# Altium PCB CATZILLA.PcbDoc (part 1 of 3)
Units mm, origin at the board's own origin, x right, y up, seen from the top; angles counter-clockwise.
Board outline 100 x 100 mm, 2 copper layers (Top Layer, Bottom Layer), stack 1.57 mm thick; 150 components, 108 nets, 585 pads, 1555 vias.
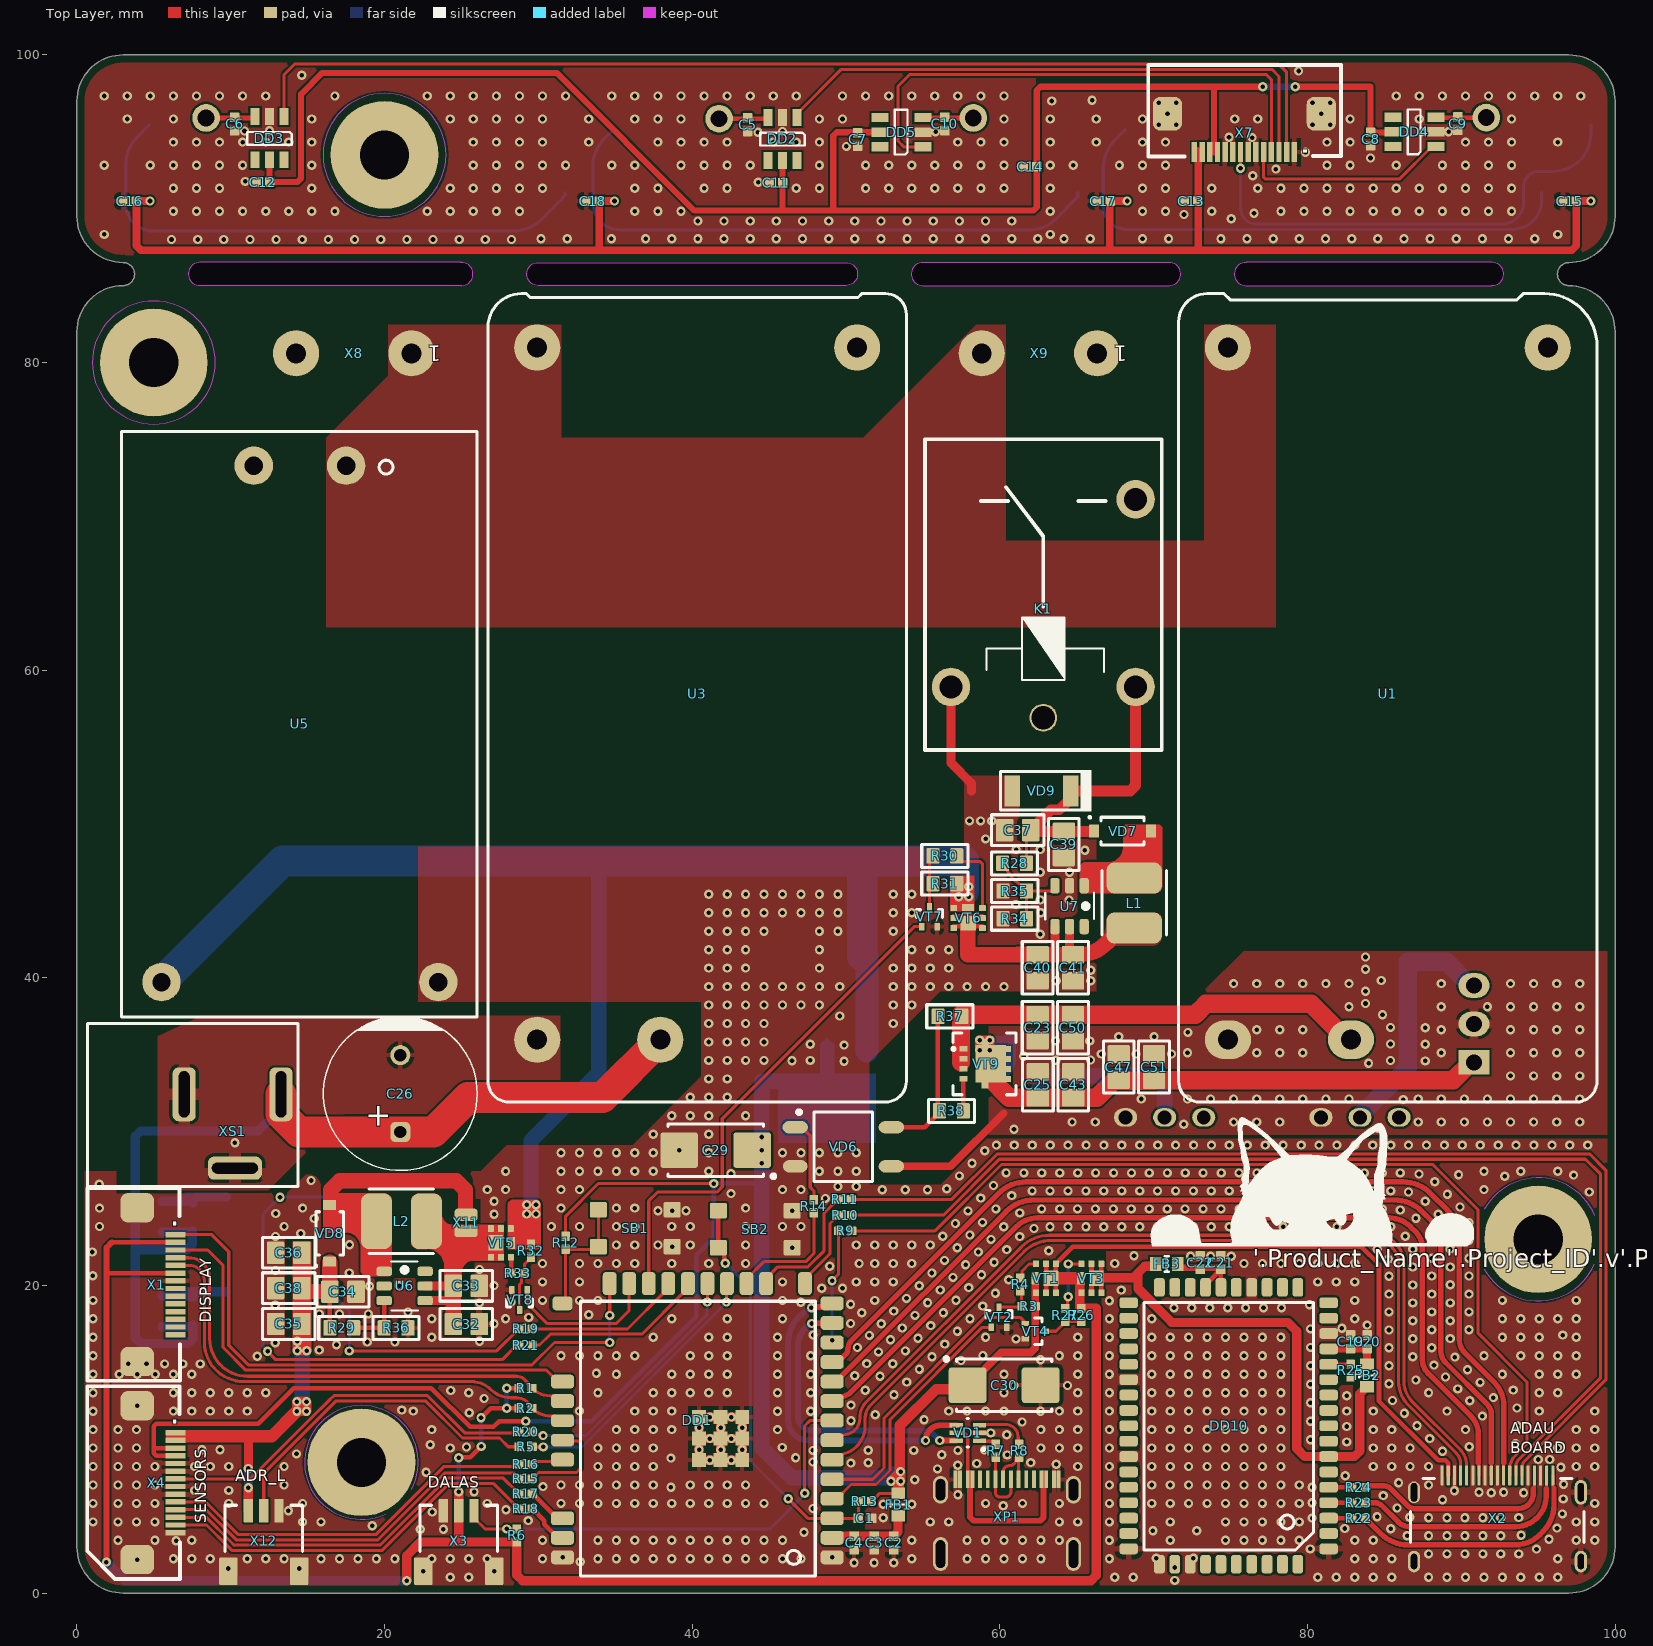
[diagram p0: Top Layer view]
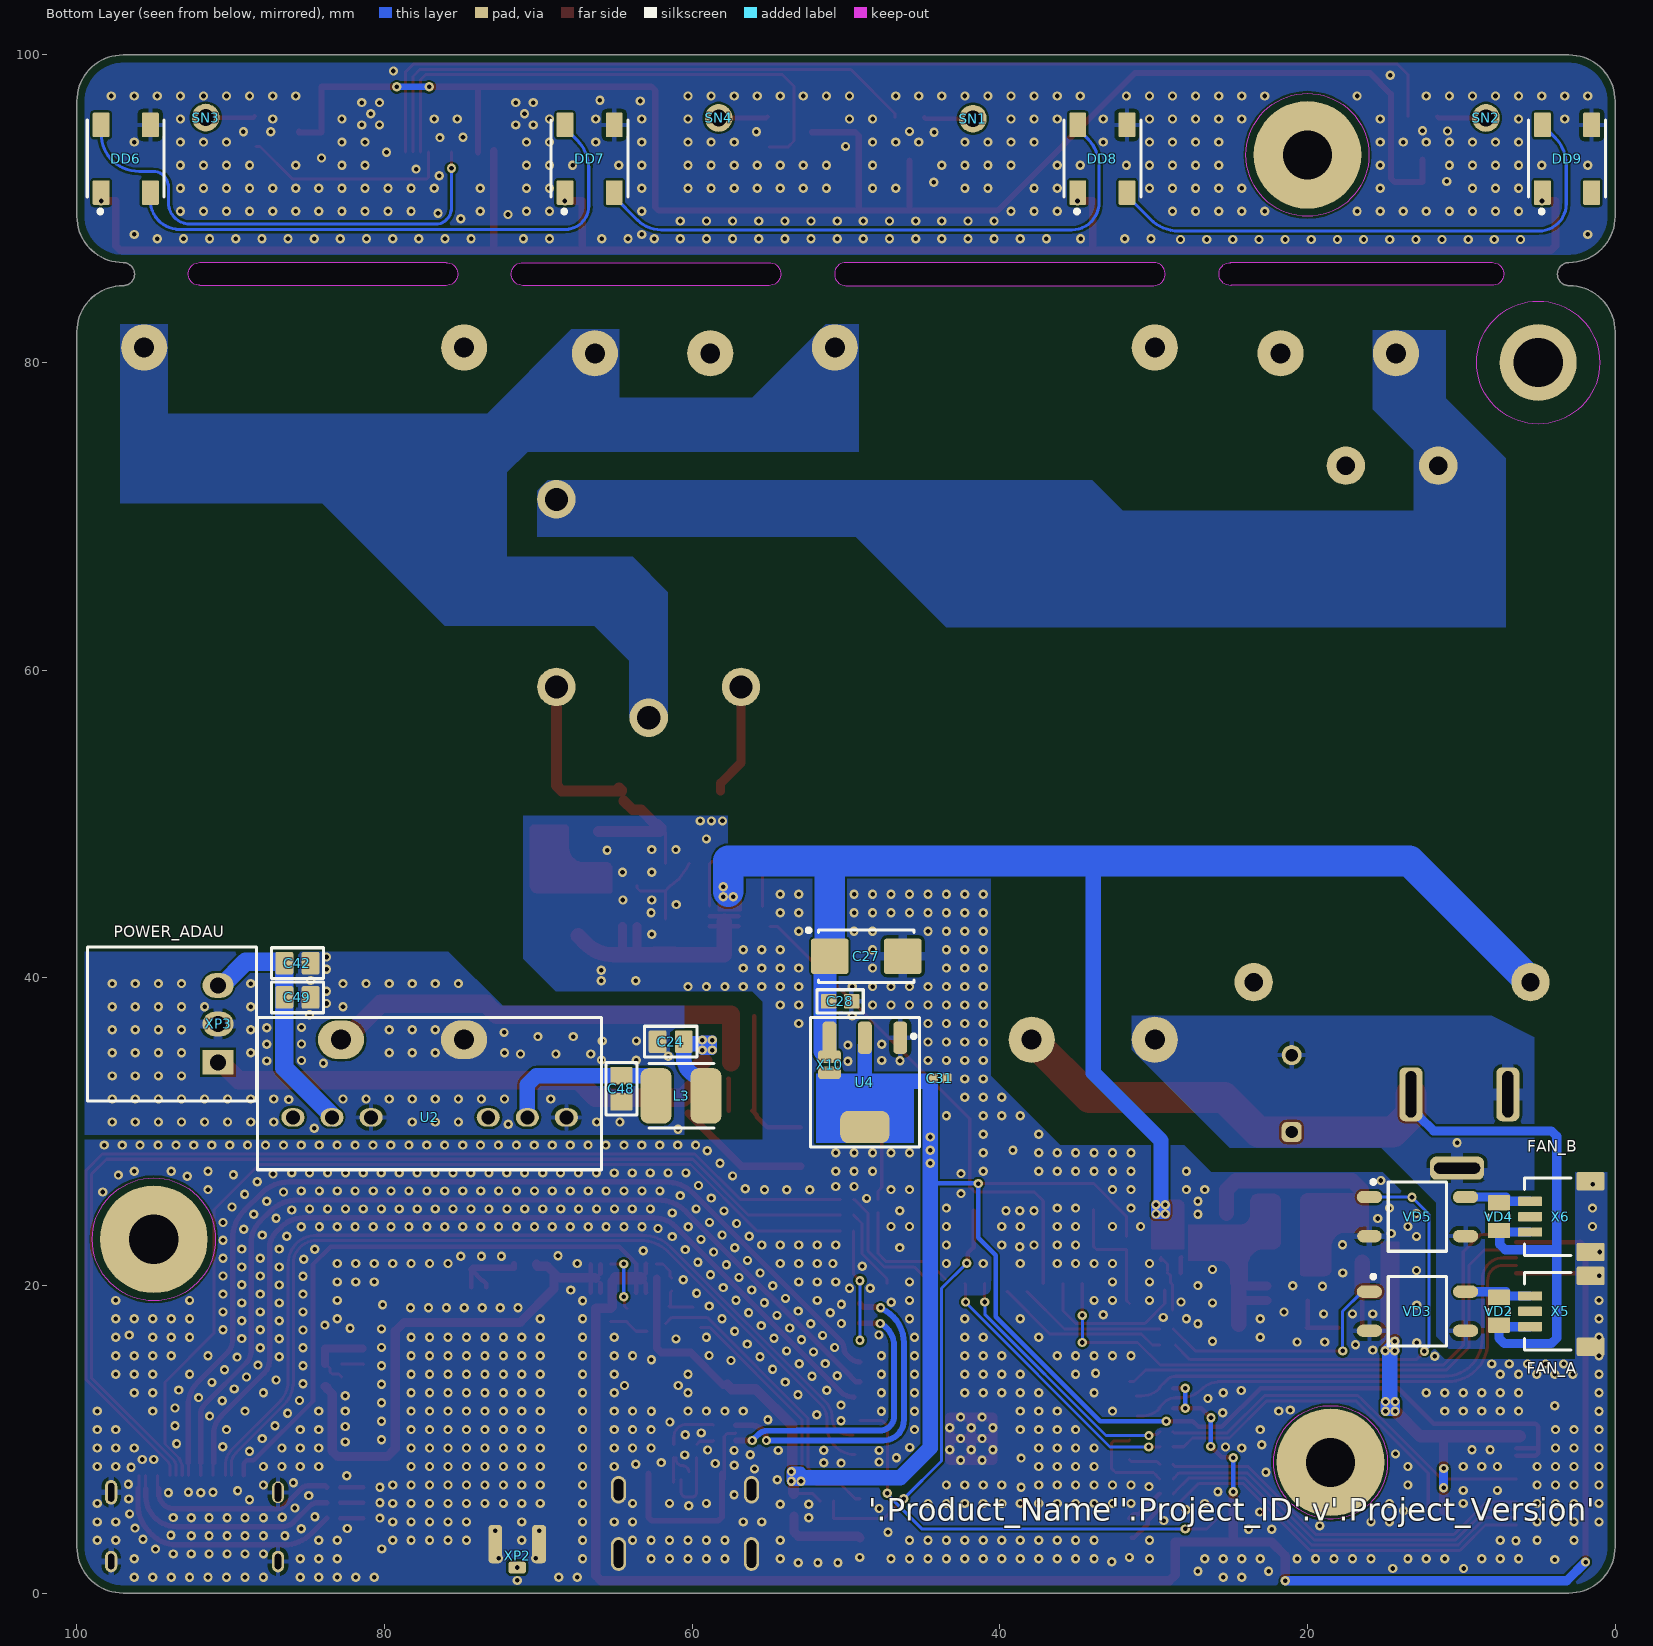
[diagram p1: Bottom Layer view, seen from below]

## Layer stack, top to bottom
Top Solder: solder mask 0.02, Solder Resist, Dk 3.8
Top Layer: signal copper 0.035
Dielectric 1: dielectric 1.5, FR-4, Dk 4.5
Bottom Layer: signal copper 0.035
Bottom Solder: solder mask 0.02, Solder Resist, Dk 3.8

## Board outline
0,3 0,82 cw(c3,82) 3,85 ccw(c3,85.75) 3,86.5 cw(c3,89.5) 0,89.5 0,97 cw(c3,97) 3,100 97,100 cw(c97,97) 100,97 100,89.5 cw(c97,89.5) 97,86.5 ccw(c97,85.75) 97,85 cw(c97,82) 100,82 100,3 cw(c97,3) 97,0 3,0 cw(c3,3)
cut-out: 8,85.01 24.99,85.01 25,85 ccw(c25,85.75) 25,86.5 24.99,86.51 8,86.51 ccw(c8,85.76)
cut-out: 30,85 cw(c30,85.75) 30,86.5 50,86.5 cw(c50,85.75) 50,85
cut-out: 55,85 71,85 ccw(c71,85.75) 71,86.5 55,86.5 ccw(c55,85.75)
cut-out: 76,85 91.99,85 92,85.01 ccw(c92,85.76) 92,86.51 76.01,86.51 76,86.5 ccw(c76,85.75)

## Design rules (kind name [scope] priority, off if disabled: settings)
BoardOutlineClearance [All] p1: gap=0.5 ignorepadtopadclearanceinfootprint=FALSE
Clearance [InNetClass('I2S1') or InNetClass('I2S2')] p1: gap=0.1 ignorepadtopadclearanceinfootprint=FALSE
Clearance MiddleVoltage [InNetClass('MiddleVoltage')] p2: gap=0.5 ignorepadtopadclearanceinfootprint=FALSE except(0: Arc-Hole Track-Hole SMDPad-Hole THPad-Hole Via-Hole Fill-Hole Poly-Hole Region-Hole Text-Hole; 0.2: Arc-Text Track-Text SMDPad-Text THPad-Text Via-Text Fill-Text Poly-Text Region-Text Text-Text)
Clearance HighVoltage [InNetClass('HighVoltage')] p3: gap=1 ignorepadtopadclearanceinfootprint=FALSE except(0: Arc-Hole Track-Hole SMDPad-Hole THPad-Hole Via-Hole Fill-Hole Poly-Hole Region-Hole Text-Hole; 0.2: Arc-Text Track-Text SMDPad-Text THPad-Text Via-Text Fill-Text Poly-Text Region-Text Text-Text)
Clearance Standart [All] p4: gap=0.14 ignorepadtopadclearanceinfootprint=FALSE
ComponentClearance [All] p1: gap=0.1 collisioncheckmode=3 verticalgap=0.1 showdistances=TRUE
DiffPairsRouting [All] p1: maxlimit=0.254 minlimit=0.254 mostfreqgap=0.254 toplayer_minwidth=0.381 toplayer_maxwidth=0.381 toplayer_prefwidth=0.381 bottomlayer_minwidth=0.381 bottomlayer_maxwidth=0.381 bottomlayer_prefwidth=0.381 maxuncoupledlength=12.7
Height [All] p1: minheight=0 maxheight=40 prefheight=12.7
HoleSize [All] p1: absolutevalues=TRUE maxlimit=12 minlimit=0.3 maxpercent=80.000 minpercent=20.000
HoleToHoleClearance [All] p1: gap=0.3 allowstackedmicrovias=TRUE
MatchedLengths QSPI [InNetClass('QSPI')] p1: tolerance=0.1 checknetsindiffpair=FALSE checkdiffpairvsdiffpair=TRUE checkxsignals=TRUE checkothers=TRUE
MatchedLengths I2S4 [InNetClass('I2S4')] p2: tolerance=0.1 checknetsindiffpair=FALSE checkdiffpairvsdiffpair=TRUE checkxsignals=TRUE checkothers=TRUE
MatchedLengths I2S3 [InNetClass('I2S3')] p3: tolerance=0.1 checknetsindiffpair=FALSE checkdiffpairvsdiffpair=TRUE checkxsignals=TRUE checkothers=TRUE
MatchedLengths I2S2 [InNetClass('I2S2')] p4: tolerance=0.1 checknetsindiffpair=FALSE checkdiffpairvsdiffpair=TRUE checkxsignals=TRUE checkothers=TRUE
MatchedLengths I2S1 [InNetClass('I2S1')] p5: tolerance=0.1 checknetsindiffpair=FALSE checkdiffpairvsdiffpair=TRUE checkxsignals=TRUE checkothers=TRUE
MatchedLengths I2S0 [InNetClass('I2S0')] p6: tolerance=0.1 checknetsindiffpair=FALSE checkdiffpairvsdiffpair=TRUE checkxsignals=TRUE checkothers=TRUE
MinimumSolderMaskSliver [All] p1: minsoldermaskwidth=0.1
NetAntennae [All] p1: netantennaetolerance=2
PlaneClearance [All] p1: clearance=0.3
PlaneConnect PlaneConnectMiddleCurrent [InNetClass('MiddleCurrent')] p1: planeconnectstyle=Relief reliefexpansion=0.508 reliefentries=4 reliefconductorwidth=0.5 reliefairgap=0.3
PlaneConnect PlaneHighCurrent [InNetClass('HighCurrent')] p2: planeconnectstyle=Relief reliefexpansion=0.508 reliefentries=4 reliefconductorwidth=0.5 reliefairgap=0.35
PlaneConnect [All] p3: planeconnectstyle=Relief reliefexpansion=0.508 reliefentries=4 reliefconductorwidth=0.3 reliefairgap=0.3
PolygonConnect PolygonConnectMiddleCurrent [All vs InNetClass('MiddleCurrent')] p1: connectstyle=Relief reliefconductorwidth=0.4 reliefentries=4 polygonreliefangle="90 Angle" airgapwidth=0.3
PolygonConnect PolygonHighCurrent [InNetClass('HighCurrent')] p2: connectstyle=Relief reliefconductorwidth=0.5 reliefentries=4 polygonreliefangle="90 Angle" airgapwidth=0.3
PolygonConnect PolygonConnect_Keepout [(ObjectKind = 'Track') And (Layer = 'KeepOutLayer')] p3: connectstyle=Direct reliefconductorwidth=0.254 reliefentries=4 polygonreliefangle="90 Angle" airgapwidth=0.254
PolygonConnect PolygonConnect_Via [IsVia] p4: connectstyle=Direct reliefconductorwidth=0.254 reliefentries=4 polygonreliefangle="90 Angle" airgapwidth=0.254
PolygonConnect [All] p5: thpad.connectstyle=Relief thpad.reliefconductorwidth=0.3 thpad.reliefentries=4 thpad.polygonreliefangle="90 Angle" thpad.airgapwidth=0.25 smdpad.connectstyle=Relief smdpad.reliefconductorwidth=0.3 smdpad.reliefentries=4 smdpad.polygonreliefangle="90 Angle" smdpad.airgapwidth=0.25 via.connectstyle=Direct via.reliefconductorwidth=0.3 via.reliefentries=4 via.polygonreliefangle="90 Angle" via.airgapwidth=0.3
RoutingCorners [All] p1: cornerstyle=45-Degree minsetback=1 maxsetback=3
RoutingVias Power [InNetClass('Power')] p1: holewidth=0.8 width=1.5 viastyle="Through Hole" minholewidth=0.5 minwidth=1 maxholewidth=1.2 maxwidth=3
RoutingVias [All] p2: holewidth=0.4 width=0.6 viastyle="Through Hole" minholewidth=0.3 minwidth=0.3 maxholewidth=3 maxwidth=5
SilkToSilkClearance [All] p1: silktosilkclearance=0
SilkToSolderMaskClearance [IsPad] p1: minsilkscreentomaskgap=0.05 clearancetoexposedcopper=TRUE
SolderMaskExpansion SolderMaskExpansion_VIA [IsVia] p1: expansion=-3 istentingtop=TRUE useseparateexpansions=TRUE expansionbottom=-3 istentingbottom=TRUE
SolderMaskExpansion [All] p2: expansion=0.05 istentingtop=FALSE
Width Width_ANT [InNetClass('Anthenna')] p1: maxlimit=1.641 minlimit=0.2 preferedwidth=1.641
Width WidthMiddleCurrent [InNetClass('MiddleCurrent')] p2: maxlimit=2 minlimit=0.35 preferedwidth=0.5
Width WidthHighCurrent [InNetClass('HighCurrent')] p3: maxlimit=5 minlimit=0.5 preferedwidth=1
Width Width_50_r [InNetClass('I2S1') or InNetClass('I2S2')] p4: maxlimit=0.4 minlimit=0.15 preferedwidth=0.35 impedanceprofiledriven=TRUE impedanceprofileid={838E95F1-A316-4909-9744-1A738FEB77C5} impedanceprofilevalue=50.000000 minimp=50.000000 maximp=50.000000 favimp=50.000000
18 further rules are at their usual default settings.

## Classes and differential pairs
component class U_SENS+LEDS: C5 C6 C7 C8 C9 C10 C11 C12 C13 C14 C15 C16 C17 C18 DD2 DD3 DD4 DD5 DD6 DD7 DD8 DD9 SN1 SN2 SN3 SN4 X7
component class U_BLE: C19 C20 C21 C22 DD10 FB2 FB3 R22 R23 R24 R25 R26 R27 VT3 VT4 XP2
component class CATZILLA: C1 C2 C3 C4 DD1 FB1 R1 R2 R3 R4 R5 R6 R7 R8 R9 R10 R11 R12 R13 R14 R15 R16 R17 R18 R19 R20 R21 SB1 SB2 VD1 VD2 VD3 VD4 VD5 VT1 VT2 X1 X2 X3 X4 X5 X6 XP1
net class USB: USB_P_N USB_P_P
net class I2S1: BLE_BCLK BLE_LRCLK BLE_SDATA
component class U_POWER: C23 C24 C25 C26 C27 C28 C29 C30 C31 C32 C33 C34 C35 C36 C37 C38 C39 C40 C41 C42 C43 C47 C48 C49 C50 C51 FB? K1 L1 L2 L3 R28 R29 R30 R31 R32 R33 R34 R35 R36 R37 R38 S? U1 U2 U3 U4 U5 U6 U7 VD6 VD7 VD8 VD9 VT5 VT6 VT7 VT8 VT9 X8 X9 X10 X11 X12 XP3 XS1
net class I2S2: ESP32_BCLK ESP32_DIN ESP32_LRCLK
differential pair USB_P: +USB_P_P -USB_P_N

## Components (designator, comment, footprint, x,y, rotation, side; value= is the part's Value field where it differs from the comment)
C1 "0.1uF" C0402(1005)#1 51.232,4.859 r180 top
C2 "0.1uF" C0402(1005)#1 53.106,3.26 r90 top
C3 "10uF" C0402(1005)#1 51.831,3.26 r90 top
C4 "10uF" C0402(1005)#1 50.531,3.261 r90 top
C5 "RSVD" C0402(1005)#1 43.6,95.46 r270 top value=0.1uF
C6 "RSVD" C0402(1005)#1 10.25,95.51 r270 top value=0.1uF
C7 "0.1uF" C0402(1005)#1 50.75,94.5 r270 top
C8 "0.1uF" C0402(1005)#1 84.1,94.525 r270 top
C9 "RSVD" C0402(1005)#1 89.775,95.535 r270 top value=0.1uF
C10 "RSVD" C0402(1005)#1 56.425,95.51 r270 top value=0.1uF
C11 "0.1uF" C0402(1005)#1 45.443,91.684 r180 top
C12 "0.1uF" C0402(1005)#1 12.093,91.734 r180 top
C13 "10uF" C0402(1005)#1 72.435,90.5 r0 top
C14 "10uF" C0402(1005)#1 61.965,92.725 r0 top
C15 "0.1uF" C0402(1005)#1 97.035,90.5 r180 top
C16 "0.1uF" C0402(1005)#1 3.435,90.5 r180 top
C17 "0.1uF" C0402(1005)#1 66.735,90.5 r180 top
C18 "0.1uF" C0402(1005)#1 33.535,90.5 r180 top
C19 "0.1uF" C0402(1005)#1 82.8,16.34 r270 top
C20 "10uF" C0402(1005)#1 83.875,16.34 r270 top
C21 "0.1uF" C0402(1005)#2 74.375,21.489 r90 top
C22 "10uF" C0402(1005)#3 73.028,21.489 r270 top
C23 "10uF" C0805(2012) 62.456,36.75 r270 top
C24 "10uF" C0805(2012) 61.4,35.85 r0 bottom
C25 "10uF" C0805(2012) 62.475,33.05 r90 top
C26 "1000uF" "CAP 10x16" 21.025,32.475 r90 top
C27 "47uF" CASE_C(6032) 48.68,41.4 r180 bottom
C28 "0.1uF" C0603(1608) 50.38,38.475 r180 bottom
C29 "47uF" CASE_C(6032) 41.525,28.797 r180 top
C30 "47uF" CASE_C(6032) 60.275,13.518 r0 top
C31 "0.1uF" C0402(1005)#1 43.902,33.468 r180 bottom
C32 "10uF" C0805(2012) 25.313,17.489 r0 top
C33 "10uF" C0805(2012) 25.313,19.973 r0 top
C34 "10uF" C0805(2012) 17.296,19.592 r0 top
C35 "10uF" C0805(2012) 13.771,17.5 r180 top
C36 "10uF" C0805(2012) 13.771,22.126 r180 top
C37 "10uF" C0805(2012) 61.161,49.6 r180 top
C38 "10uF" C0805(2012) 13.771,19.825 r180 top
C39 "10uF" C0805(2012) 64.161,48.67 r270 top
C40 "10uF" C0805(2012) 62.456,40.654 r270 top
C41 "10uF" C0805(2012) 64.756,40.654 r270 top
C42 "10uF" C0805(2012) 85.659,40.953 r0 bottom
C43 "10uF" C0805(2012) 64.775,33.05 r90 top
C47 "10uF" C0805(2012) 67.727,34.199 r90 top
C48 "10uF" C0805(2012) 64.599,32.79 r270 bottom
C49 "10uF" C0805(2012) 85.659,38.728 r0 bottom
C50 "10uF" C0805(2012) 64.756,36.75 r270 top
C51 "10uF" C0805(2012) 70.027,34.199 r90 top
DD1 "ESP32-S3-WROOM-1U_1" ESP32-S3-WROOM-1U 40.326,10.148 r180 top
DD2 "TTP223-BA6" SOT23-6L 45.871,94.534 r270 top
DD3 "TTP223-BA6" SOT23-6L 12.521,94.584 r270 top
DD4 "TTP223-BA6" SOT23-6L 86.95,95 r180 top
DD5 "TTP223-BA6" SOT23-6L 53.6,94.975 r180 top
DD6 "WS2812B" WS2812 96.825,93.25 r90 bottom
DD7 "WS2812B" WS2812 66.666,93.25 r90 bottom
DD8 "WS2812B" WS2812 33.333,93.25 r90 bottom
DD9 "WS2812B" WS2812 3.125,93.25 r90 bottom
DD10 "SJR-BTM334" BTM334 74.875,10.925 r180 top
FB1 "BLM18KG102" BLM18(0603) 53.395,5.759 r90 top
FB2 "BLM18KG102" BLM18(0603) 83.875,14.15 r90 top
FB3 "BLM18KG102" BLM18(0603) 70.85,21.4 r0 top
K1 "LEG-12" Relay10A 62.825,64.908 r270 top
L1 "10uH" "WE-LQS SMD 4018" 68.738,43.364 r90 top
L2 "10uH" "WE-LQS SMD 4018" 22.603,24.17 r180 top
L3 "10uH" "WE-LQS SMD 4018" 62.223,32.325 r180 bottom
R1 "4.7 k" R0402 29.158,13.326 r180 top
R2 "4.7 k" R0402 29.158,12.026 r180 top
R3 "100 k" R0402 61.875,18.65 r0 top
R4 "100" R0402 61.326,20.065 r90 top
R5 "330" R0402 29.175,9.515 r180 top
R6 "4.7 k" R0402 28.6,3.75 r270 top
R7 "22" R0402 59.741,9.251 r90 top
R8 "22" R0402 61.25,9.25 r90 top
R9 "330" R0402 49.951,23.55 r0 top
R10 "330" R0402 49.951,24.575 r180 top
R11 "330" R0402 49.919,25.6 r180 top
R12 "10 k" R0402 31.775,22.775 r270 top
R13 "10 k" R0402 51.232,5.975 r180 top
R14 "330" R0402 47.913,25.15 r90 top
R15 "330" R0402 29.175,7.425 r0 top
R16 "330" R0402 29.175,8.375 r0 top
R17 "330" R0402 29.175,6.45 r0 top
R18 "330" R0402 29.175,5.475 r0 top
R19 "330" R0402 29.167,17.175 r180 top
R20 "330" R0402 29.175,10.49 r0 top
R21 "330" R0402 29.167,16.125 r180 top
R22 "51" R0402 83.325,4.875 r0 top
R23 "51" R0402 83.325,5.875 r0 top
R24 "51" R0402 83.325,6.875 r0 top
R25 "10 k" R0402 82.8,14.475 r90 top
R26 "100 k" R0402 65.3,18.075 r270 top
R27 "100" R0402 64.25,18.075 r90 top
R28 "100 k" R0603 60.958,47.442 r0 top
R29 "100 k" R0603 17.222,17.244 r180 top
R30 "100" R0603 56.425,47.926 r0 top
R31 "100 k" R0603 56.425,46.125 r0 top
R32 "100 k" R0402 29.521,22.26 r90 top
R33 "100" R0402 28.673,20.81 r180 top
R34 "10 k" R0603 60.97,43.842 r0 top
R35 "10 k" R0603 60.97,45.642 r0 top
R36 "10 k" R0603 20.752,17.239 r180 top
R37 "100 k" R0603 56.75,37.5 r0 top
R38 "100" R0603 56.85,31.35 r180 top
SB1 "FB-10B" FB-10B 36.3,23.711 r0 top
SB2 "FB-10B" FB-10B 44.1,23.648 r0 top
SN1 "PAD-1.1mm" PAD-1.1mm 41.75,95.85 r270 bottom
SN2 "PAD-1.1mm" PAD-1.1mm 8.4,95.9 r270 bottom
SN3 "PAD-1.1mm" PAD-1.1mm 91.625,95.925 r270 bottom
SN4 "PAD-1.1mm" PAD-1.1mm 58.275,95.9 r270 bottom
U1 "IRM-20-15" IRM-20-xx_REC#1 85.225,58.475 r90 top locked
U2 "WRB1212CS-3W" "SIP-8 22.0x9.5x12.0mm 6pin" 77.075,32.475 r0 bottom
U3 "IRM-20-15" IRM-20-xx_REC#2 40.325,58.475 r90 top
U4 "LD1117STR" SOT223 48.775,32.95 r270 bottom value=LD1117S33CTR
U5 "HI-LINK 5M03" HLINK_5MXX 14.5,56.5 r180 top
U6 "MT3608" SOT23-6 21.305,19.967 r270 top
U7 "MT3608" SOT23-6 64.535,44.662 r180 top
VD1 "USBLC6-2SC6" SOT-666 57.915,10.417 r180 top
VD2 "1N4148" D0805 7.549,18.325 r90 bottom
VD3 "AQY282SX" SOP-4N#1 12.849,18.325 r180 bottom
VD4 "1N4148" D0805 7.549,24.475 r90 bottom
VD5 "AQY282SX" SOP-4N#2 12.849,24.475 r180 bottom
VD6 "AQY282SX" SOP-4N#2 49.825,29.016 r0 top
VD7 "1N5819HW-7-F" SOD-123 67.98,49.537 r0 top
VD8 "1N5819HW-7-F" SOD-123 16.436,23.394 r90 top
VD9 "1N4148" SOD-80 63.799,52.151 r180 top
VT1 "DMP1009UFDF-13" U-DFN2020-6_SLDR 62.981,20.462 r180 top
VT2 "DTC143ZET1G" SOT-416 59.95,17.925 r0 top
VT3 "DMP1009UFDF-13" U-DFN2020-6_SLDR 65.931,20.462 r180 top
VT4 "DTC143ZET1G" SOT-416 62.3,17.025 r270 top
VT5 "DMP1009UFDF-13" U-DFN2020-6_SLDR 27.586,22.765 r0 top
VT6 "DMP1009UFDF-13" U-DFN2020-6_SLDR 57.935,43.9 r90 top
VT7 "DTC143ZET1G" SOT-416 55.425,43.975 r0 top
VT8 "DTC143ZET1G" SOT-416 28.78,19.06 r180 top
VT9 "AON7403" DFN3X3 59.05,34.4 r270 top
X1 "FPC_14PIN" FPC-14-0.5mm 3.8,20.052 r0 top
X2 "HDMI-302-1-N-30" MINI-HDMI 92.35,4 r180 top locked
X3 "A1001WR-S-3P" A1001WR-S-03P 24.825,2.85 r0 top
X4 "FPC_14PIN" FPC-14-0.5mm 3.8,7.178 r0 top locked
X5 "A1001WR-S-3P" A1001WR-S-03P 3.02,18.325 r90 bottom
X6 "A1001WR-S-3P" A1001WR-S-03P 3.02,24.475 r90 bottom
X7 "FPC_14PIN" FPC-14-0.5mm 75.9,96.3 r270 top
X8 "DG300-7.5-02P-13-02Z(H)" DG300-7.5-02P-13-02Z(H) 18,80.6 r180 top
X9 "DG300-7.5-02P-13-02Z(H)" DG300-7.5-02P-13-02Z(H) 62.575,80.6 r180 top
X10 "Jumper 1.5х2" NetTie1.5х2 51.07,33.829 r90 bottom net-tie
X11 "Jumper 1.5х2" NetTie1.5х2 25.302,24.59 r270 top net-tie
X12 "A1001WR-S-3P" A1001WR-S-03P 12.15,2.85 r0 top
XP1 "USB-Type-C-B-229" USB-Type-C-B-229 60.466,4.719 r0 top
XP2 "U.FL-R-SMT-1(01)" "IPEX_ RECE.20279.001E.01" 71.376,3.19 r180 bottom
XP3 "A2501WR-03P" A2501WR-03P 90.825,37 r90 bottom
XS1 "DJK-02A" DC-140-003 4.875,36.925 r270 top

## Footprints (in the part's own frame and the unit in brackets; to place one, negate y for a bottom-side part, rotate by r counter-clockwise, add the part's x,y. Pads: shape width x height; smd on the part's side, far side on the other; paste and mask are expansions set on the pad)
A1001WR-S-03P [mm]
  rrect15% 0.6x1.55 smd mask+0.05: 1(-1.003,2.507) 2(-0.003,2.507) 3(0.997,2.507)
  rrect15% 1.2x1.8 smd mask+0.05: MP(-2.3,-1.425) MP(2.3,-1.425)
  silkscreen extent -2.52,-0.14 2.51,2.86, body extent -2.52,-2.09 2.48,2.86, height 3.25
A2501WR-03P [mm]
  rect 1.6x2 hole 1.05: 1(-2.5,0)
  oval 1.6x2 hole 1.05: 2(0,0) 3(2.5,0)
  silkscreen extent -5,-2.5 5,8.48, body extent -5.12,-2.28 5.12,9.47, height 6
BLM18(0603) [mm] "Ferrite  Chips series blm18 Case 0603 (1.60mm x 0.80mm)"
  rect 0.75x0.9 smd: 1(-0.725,0) 2(0.725,0)
  silkscreen extent -0.15,-0.5 0.15,0.5, body extent -0.8,-0.4 0.8,0.4, height 0.8
BTM334 [mm]
  rrect50% 1.2x0.7 smd: 1(-6.5,8.05) 2(-6.5,7.05) 3(-6.5,6.05) 4(-6.5,5.05) 5(-6.5,4.05) 6(-6.5,3.05) 7(-6.5,2.05) 8(-6.5,1.05) 9(-6.5,0.05) 10(-6.5,-0.95) 11(-6.5,-1.95) 12(-6.5,-2.95) 13(-6.5,-3.95) 14(-6.5,-4.95) 15(-6.5,-5.95) 16(-6.5,-6.95) 17(-6.5,-7.95) 28(6.5,-7.95) 29(6.5,-6.95) 30(6.5,-5.95) 31(6.5,-4.95) 32(6.5,-3.95) 33(6.5,-2.95) 34(6.5,-1.95) 35(6.5,-0.95) 36(6.5,0.05) 37(6.5,1.05) 38(6.5,2.05) 39(6.5,3.05) 40(6.5,4.05) 41(6.5,5.05) 42(6.5,6.05) 43(6.5,7.05) 44(6.5,8.05)
  rrect50% 0.7x1.2 smd: 18(-4.5,-8.95) 19(-3.5,-8.95) 20(-2.5,-8.95) 21(-1.5,-8.95) 22(-0.5,-8.95) 23(0.5,-8.95) 24(1.5,-8.95) 25(2.5,-8.95) 26(3.5,-8.95) 27(4.5,-8.95) 45(4.5,9.05) 46(3.5,9.05) 47(2.5,9.05) 48(1.5,9.05) 49(0.5,9.05) 50(-0.5,9.05) 51(-1.5,9.05) 52(-2.5,9.05) 53(-3.5,9.05) 54(-4.5,9.05)
  silkscreen extent -5.53,-7.97 5.5,8.13, body extent -6.53,-8.98 6.53,9.08, height 2.16
C0402(1005)#1 [mm]
  rrect15% 0.62x0.62 smd mask+0.05: 1(-0.44,0) 2(0.44,0)
  body extent -0.52,-0.27 0.53,0.28, height 0.55
C0402(1005)#2 [mm]
  rrect15% 0.62x0.62 smd mask+0.05: 1(-0.44,0)
  rrect15% 0.6x0.62 smd mask+0.05: 2(0.44,0)
  body extent -0.52,-0.27 0.53,0.28, height 0.55
C0402(1005)#3 [mm]
  rrect15% 0.6x0.62 smd mask+0.05: 1(-0.44,0)
  rrect15% 0.62x0.62 smd mask+0.05: 2(0.44,0)
  body extent -0.52,-0.27 0.53,0.28, height 0.55
C0603(1608) [mm]
  rrect15% 1x0.95 smd mask+0.05: 1(-0.75,0) 2(0.75,0)
  Top Layer pour cut-out: -0.05,0.45 0.05,0.45 0.05,-0.45 -0.05,-0.45
  silkscreen extent -1.5,-0.75 1.5,0.75, body extent -0.9,-0.5 0.9,0.5, height 0.9
C0805(2012) [mm]
  rrect15% 1.15x1.45 smd mask+0.05: 1(-0.85,0) 2(0.85,0)
  Top Layer pour cut-out: -0.05,0.651 0.05,0.651 0.05,-0.649 -0.05,-0.649
  silkscreen extent -1.7,-1 1.7,1, body extent -1.1,-0.72 1.1,0.73, height 0.75
"CAP 10x16" [mm]
  rrect50% 1.3x1.3 hole 0.8: 1(-2.5,0)
  round 1.3 hole 0.8: 2(2.5,0)
  silkscreen extent -5,-5 5,5, body extent -5,-5 5,5, height 16
CASE_C(6032) [mm]
  rrect15% 2.45x2.3 smd: 1(-2.375,0) 2(2.375,0)
  silkscreen extent -3.88,-1.7 3.1,1.82, body extent -3,-1.6 3,1.6, height 2.5
D0805 [mm]
  rrect15% 1x1.45 smd mask+0.05: 1(-0.9,0) 2(0.9,0)
  silkscreen extent -0.1,-0.67 0.1,0.67, body extent -1.1,-0.72 1.1,0.73, height 0.95
DC-140-003 [mm]
  rrect50% 3.5x1.5 hole 0.7 slot 3 at 0 deg: 1(4.5,8.4) 2(4.5,2.1)
  rrect50% 1.5x3.5 hole 0.7 slot 3 at 90 deg: 3(9.3,5.4)
  silkscreen extent -0.1,-4.18 10.5,9.5, body extent 0,-5.35 9.45,9.15, height 11
DFN3X3 [mm]
  rect 0.35x0.5 smd: 1(-0.983,-1.408) 2(-0.333,-1.408) 3(0.317,-1.408) 4(0.967,-1.408)
  rect 0.4x0.35 smd: 5(0.967,1.492) 6(0.317,1.492) 7(-0.333,1.492) 8(-0.983,1.492)
  rect 0.4x0.45 smd: 8(-1.423,-0.008) 8(1.407,-0.008)
  rect 2.45x1.98 smd: 8(-0.008,0.352)
  silkscreen extent -2,-2.11 2,2, body extent -1.6,-1.6 1.6,1.6, height 0.56
DG300-7.5-02P-13-02Z(H) [mm]
  round 3 hole 1.3: 1(-3.75,0) 2(3.75,0)
  body extent -8.12,-4.1 7.48,5, height 12.6
ESP32-S3-WROOM-1U [mm]
  rrect50% 1.5x0.9 smd: 1(-8.774,7.825) 2(-8.774,6.555) 3(-8.774,5.285) 4(-8.774,4.015) 5(-8.774,2.745) 6(-8.774,1.475) 7(-8.774,0.205) 8(-8.774,-1.065) 9(-8.774,-2.335) 10(-8.774,-3.605) 11(-8.774,-4.875) 12(-8.774,-6.145) 13(-8.774,-7.415) 14(-8.774,-8.685) 31(8.751,-3.605) 32(8.751,-2.335) 35(8.751,1.473) 38(8.751,5.285) 39(8.751,6.555) 40(8.751,7.825)
  rrect50% 0.9x1.5 smd: 15(-7.008,-9.975) 17(-4.478,-9.975) 18(-3.208,-9.975) 19(-1.938,-9.975) 20(-0.668,-9.975) 21(0.602,-9.975) 22(1.881,-9.975) 23(3.151,-9.975) 24(4.421,-9.975) 25(5.691,-9.975)
  rrect50% 1.3x0.9 smd: 27(8.751,-8.685)
  rrect50% 1.5x0.8 smd: 33(8.751,-1.065) 34(8.751,0.205)
  rect 0.9x0.9 smd: TP(-2.924,-1.295) TP(-2.924,0.105) TP(-2.924,1.505) TP(-1.524,0.105) TP(-1.524,-1.295) TP(-1.524,1.505) TP(-0.124,1.505) TP(-0.124,0.105) TP(-0.124,-1.295)
  silkscreen extent -7.67,-8.82 7.58,9.03, body extent -9.02,-10.18 8.98,9.01, height 3.35
FB-10B [mm] "Tamper switch"
  rrect15% 1.1x1 smd: 1(-2.4,-1.187) 1(-2.4,1.213) 2(2.4,-1.187) 2(2.4,1.212)
  body extent -2.35,-2.33 2.35,2.37, height 3.81
FPC-14-0.5mm [mm]
  rect 1.3x0.35 smd: 1(2.625,3.25) 2(2.625,2.75) 3(2.625,2.25) 4(2.625,1.75) 5(2.625,1.25) 6(2.625,0.75) 7(2.625,0.25) 8(2.625,-0.25) 9(2.625,-0.75) 10(2.625,-1.25) 11(2.625,-1.75) 12(2.625,-2.25) 13(2.625,-2.75) 14(2.625,-3.25)
  rrect50% 2.2x1.9 smd: 15(0.125,-5) 15(0.125,5)
  silkscreen extent -3.1,-6.25 2.9,6.27, body extent -3,-5.8 2.85,5.8, height 1.3
HLINK_5MXX [mm]
  round 2.5 hole 1.2: 1(-3,-16.8) 2(3,-16.8) 3(-9,16.775) 4(9,16.775)
  silkscreen extent -11.5,-19.03 11.6,19.05, body extent -11.58,-19 11.42,19, height 18.01
"IPEX_ RECE.20279.001E.01" [mm]
  rrect50% 1.15x0.8 smd: 1(0,-1.525)
  rrect50% 0.9x2.5 smd: 2(-1.425,0) 3(1.425,0)
  body extent -1.5,-1.5 1.5,1.6, height 1.25
IRM-20-xx_REC#1 [mm] "AC-DC PSU"
  round 3 hole 1.3: 1(22.5,10.4) 2(22.5,-10.4)
  oval 2.5x3 hole 1.3: 3(-22.5,10.4) 4(-22.5,2.4)
  silkscreen extent -26.55,-13.6 26,13.6, body extent -26.5,-13.64 25.9,13.56, height 24
IRM-20-xx_REC#2 [mm] "AC-DC PSU"
  round 3 hole 1.3: 1(22.5,10.4) 2(22.5,-10.4) 3(-22.5,10.4) 4(-22.5,2.4)
  silkscreen extent -26.55,-13.6 26,13.6, body extent -26.5,-13.64 25.9,13.56, height 24
MINI-HDMI [mm]
  rrect50% 0.2x1.3 smd paste-2539.97: 1(-3.6,-3.65) 2(-3.2,-3.65) 3(-2.8,-3.65) 4(-2.4,-3.65) 5(-2,-3.65) 6(-1.6,-3.65) 7(-1.2,-3.65) 8(-0.8,-3.65) 9(-0.4,-3.65) 10(0,-3.65) 11(0.4,-3.65) 12(0.8,-3.65) 13(1.2,-3.65) 14(1.6,-3.65) 15(2,-3.65) 16(2.4,-3.65) 17(2.8,-3.65) 18(3.2,-3.65) 19(3.6,-3.65)
  oval 0.8x1.6 hole 0.4 slot 1.2 at 90 deg: 20(-5.425,-2.553)
  oval 0.8x1.4 hole 0.4 slot 1 at 90 deg: 20(-5.425,1.947) 20(5.425,1.947)
  oval 0.8x1.4 hole 0.4 slot 1.2 at 90 deg: 20(5.425,-2.553)
  silkscreen extent -5.63,-3.44 5.64,0.72, body extent -5.62,-3.95 5.63,3.95, height 3.3
NetTie1.5х2 [mm]
  rrect50% 0.8x1.5 smd paste+0.1: 1(0,0) 2(1.05,-0.002)
PAD-1.1mm [mm]
  round 1.8 hole 1.1: 1(0,0)
R0402 [mm]
  rrect15% 0.6x0.55 smd mask+0.05: 1(-0.425,0) 2(0.425,0)
  body extent -0.5,-0.25 0.5,0.25, height 0.35
R0603 [mm]
  rrect15% 0.85x1 smd mask+0.05: 1(-0.775,0) 2(0.775,0)
  silkscreen extent -1.5,-0.75 1.5,0.75, body extent -0.85,-0.42 0.85,0.38, height 0.56
Relay10A [mm]
  round 2.5 hole 1.5: 1(6,-6) 2(6,6) 3(-6.2,6)
  round 1.8 / inner round 1.8 / far side round 2.5 hole 1.5: 4(8,0)
  silkscreen extent -10.1,-7.7 10.1,7.7, body extent -9.85,-7.5 9.65,7.5, height 3.5
"SIP-8 22.0x9.5x12.0mm 6pin" [mm]
  oval 1.5x1.2 hole 0.9 mask+0.05: 1(-8.9,1.55) 2(-6.36,1.55) 3(-3.82,1.55) 6(3.8,1.55) 7(6.34,1.55) 8(8.88,1.55)
  silkscreen extent -11.18,-4.95 11.18,4.95, body extent -11.13,-4.88 11.12,4.88, height 12.82
SOD-80 [mm]
  rect 1x2 smd: 1(-0.8,0) 2(3,0)
  silkscreen extent -2.17,-1.35 3.75,1.35, body extent -0.78,-0.79 2.92,0.79, height 1.6
SOD-123 [mm]
  rrect15% 0.65x0.85 smd mask+0.05: 1(-1.85,0) 2(1.85,0)
  silkscreen extent -2.2,-0.9 1.4,0.97, body extent -1.95,-0.9 1.95,0.9, height 1.18
SOP-4N#1 [mm] "SOP, 4-Leads, Body 4,30x4,40mm, Pitch 2,54mm, IPC Medium Density"
  oval 1.65x0.8 smd: 1(-3.125,1.27) 2(-3.125,-1.27) 3(3.125,-1.27) 4(3.125,1.27)
  silkscreen extent -3,-2.25 1.9,2.37, body extent -3.4,-2.25 3.4,2.25, height 2.2
SOP-4N#2 [mm] "SOP, 4-Leads, Body 4,30x4,40mm, Pitch 2,54mm, IPC Medium Density"
  oval 1.65x0.8 smd: 1(-3.125,1.27) 3(3.125,-1.27) 4(3.125,1.27)
  oval 1.6x0.8 smd: 2(-3.125,-1.27)
  silkscreen extent -3,-2.25 1.9,2.37, body extent -3.4,-2.25 3.4,2.25, height 2.2
SOT23-6 [mm]
  rrect50% 0.6x1 smd mask+0.05: 1(-0.95,-1.33) 2(0,-1.33) 3(0.95,-1.33) 4(0.95,1.33) 5(0,1.33) 6(-0.95,1.33)
  silkscreen extent -1.59,-0.88 1.59,0.86, body extent -1.52,-1.5 1.53,1.5, height 1.25
SOT23-6L [mm] "SOT23, 6-Leads, Body 2.9x1.6mm, Pitch 0.95mm, Lead Span 2.8mm, IPC Low Density"
  rect 1.1x0.6 smd: 1(-1.4,0.95) 2(-1.4,0) 3(-1.4,-0.95) 4(1.4,-0.95) 5(1.4,0) 6(1.4,0.95)
  silkscreen extent -0.4,-1.45 0.43,1.45, body extent -1.4,-1.45 1.4,1.45, height 1.45
SOT223 [mm]
  rrect50% 2.1x0.9 smd: 1(-3.154,2.3) 2(-3.154,0) 3(-3.154,-2.3)
  rrect50% 2.1x3.2 smd: 4(2.646,0)
  silkscreen extent -4.48,-3.52 3.95,3.55, body extent -3.78,-3.25 3.18,3.25, height 1.7
SOT-416 [mm]
  rrect15% 0.35x0.5 smd mask+0.05: 1(-0.5,-0.65) 2(0.5,-0.65) 3(0,0.65)
  silkscreen extent -0.85,-0.05 0.85,0.45, body extent -0.8,-0.8 0.8,0.8, height 0.78
SOT-666 [mm]
  rrect15% 0.85x0.3 smd paste+0 mask+0.05: 1(-0.75,0.5) 2(-0.75,0) 3(-0.75,-0.5) 4(0.75,-0.5) 5(0.75,0) 6(0.75,0.5)
  silkscreen extent -1.12,-0.93 0.05,1.18, body extent -0.8,-0.85 0.8,0.85, height 0.62
U-DFN2020-6_SLDR [mm]
  rrect15% 0.4x0.425 smd mask+0.05: D(-0.669,0.937) D(-0.669,-0.938) D(-0.019,0.937) D(-0.019,-0.938) G(0.631,-0.938) S(0.631,0.938)
  rrect5% 0.95x1 smd mask+0.05: D(-0.344,0)
  rrect15% 0.48x0.8 smd mask+0.05: S(0.669,0)
  body extent -1.02,-1 0.98,1, height 0.6
USB-Type-C-B-229 [mm]
  rrect10% 0.25x1.15 smd mask+0.05: 1(3.05,2.675) 1(3.35,2.675) 2(2.25,2.675) 2(2.55,2.675) 3(1.75,2.675) 4(1.25,2.675) 5(0.75,2.675) 6(0.25,2.675) 7(-0.25,2.675) 8(-0.75,2.675) 9(-1.25,2.675) 10(-1.75,2.675) 11(-2.55,2.675) 11(-2.25,2.675) 12(-3.35,2.675) 12(-3.05,2.675)
  oval 1x2.2 hole 0.6 slot 1.8 at 90 deg mask+0.05: MS(-4.32,-2.18) MS(4.32,-2.18)
  oval 1x1.8 hole 0.6 slot 1.4 at 90 deg mask+0.05: MS(-4.32,2) MS(4.32,2)
  body extent -4.79,-4.78 4.79,2.93, height 3.31
"WE-LQS SMD 4018" [mm]
  rrect50% 2x3.6 smd: 1(-0.125,0) 2(3.125,0)
  silkscreen extent -0.58,-2.1 3.62,2.1, body extent -0.47,-2 3.53,2, height 2.15
WS2812 [mm]
  rrect15% 1.6x1.1 smd mask+0.05: 1(-2.2,1.6) 2(-2.2,-1.6) 3(2.2,-1.6) 4(2.2,1.6)
  silkscreen extent -3.48,-2.5 2.5,2.5, body extent -2.7,-2.5 2.7,2.5, height 1.6

## Part data
C1 C2 C5 C6 C7 C8 C9 C10 C11 C12 C15 C16 C17 C18 C19 C21 C31: library part "0.1uF  25V C0402", "CAP CER 0.1UF 25V X7R 0402", Manufacturer="Samsung Electro-Mechanics", Operation Temperature="-55°C ~ 125°C", Package/Case=C0402, Power (V/A)=25V, Supplier Part Number 1=1276-6854-2-ND, Temperature Coefficient=X7R, Tolerance=±10%, ComponentLink1Description=Datasheet, Library Path 1=Capacitors.SchLib, Name Component="Capacitor Ceramic", Part Number="0.1uF  25V C0402"
C3 C4 C13 C14 C20 C22: library part "10uF  6.3V C0402", "CAP CER 10UF 6.3V X6S 0402", Manufacturer="Murata Electronics North America", Manufacturer P/N=GRM155C80J106ME11D, Operation Temperature="-55°C ~ 105°C", Package/Case=C0402, Power (V/A)=6.3V, Supplier Part Number 1=490-13233-2-ND, Temperature Coefficient=X6S, Tolerance=±20%, ComponentLink1Description=Datasheet, ComponentLink1URL=https://www.murata.com/~/media/webrenewal/support/library/catalog/products/capacitor/mlcc/c02e.ashx?la=en-us, Library Path 1=Capacitors.SchLib, Name Component="Capacitor Ceramic", Part Number="10uF  6.3V C0402", Supplier 1=Digi-key
C23 C24 C25 C32 C33 C34 C35 C36 C37 C38 C39 C40 C41 C42 C43 C47 C48 C49 C50 C51: library part "10uF  16V C0805", "CAP CER 10UF 16V X6S 0805", Manufacturer="Murata Electronics North America", Manufacturer P/N=GRM21BC81C106KA73L, Operation Temperature="-55°C ~ 105°C", Package/Case=C0805, Power (V/A)=16V, Supplier Part Number 1=490-5519-2-ND, Temperature Coefficient=X6S, Tolerance=±10%, ComponentLink1Description=Datasheet, ComponentLink1URL=https://www.murata.com/~/media/webrenewal/support/library/catalog/products/capacitor/mlcc/c02e.ashx?la=en-us, Library Path 1=Capacitors.SchLib, Name Component="Capacitor Ceramic", Part Number="10uF  16V C0805", Supplier 1=Digi-key
C26: library part "1000uF  16V 10x16(EHR)", "1000uF 20% 16V EHR 10x16mm", Manufacturer=Hitano, Manufacturer P/N=EHR102M16BA, Operation Temperature="−40°C to +105°C", Package/Case=10x16(EHR), Power (V/A)=16V, Tolerance=±20%, ComponentLink1Description=Datasheet, ComponentLink1URL=https://www.rcscomponents.kiev.ua/datasheets/EHR_081225.pdf, Library Path 1=Capacitors.SchLib, Name Component="Electrolytic capacitor", Part Number="1000uF  16V 10x16(EHR)", Supplier 1=RCS
C27 C29 C30: library part "47uF  20V CASE-C", "CAP TANT 47UF 10% 20V 2312", Manufacturer=KEMET, Manufacturer P/N=T491C476K020AT, Operation Temperature="-55°C ~ 125°C", Package/Case=CASE-C, Power (V/A)=20V, Supplier Part Number 1=399-10176-2-ND, Temperature Coefficient=-, Tolerance=±10%, ComponentLink1Description=Datasheet, ComponentLink1URL=https://content.kemet.com/datasheets/KEM_T2005_T491.pdf, Library Path 1=Capacitors.SchLib, Name Component=CapacitorTantalum, Part Number="47uF  20V CASE-C", Supplier 1=Digi-key
C28: library part "0.1uF  50V C0603", "CAP CER 0.1UF 50V X7R 0603", Manufacturer="Samsung Electro-Mechanics", Manufacturer P/N=CL10B104KB8WPNC, Operation Temperature="-55°C ~ 125°C", Package/Case=C0603, Power (V/A)=50V, Supplier Part Number 1=1276-6854-2-ND, Temperature Coefficient=X7R, Tolerance=±10%, ComponentLink1Description=Datasheet, ComponentLink1URL=https://www.samsungsem.com/resources/file/global/support/product_catalog/MLCC.pdf, Library Path 1=Capacitors.SchLib, Name Component="Capacitor Ceramic", Notes="06035C104K4T4A, 06035C104K4T2A", Part Number="0.1uF  50V C0603", Supplier 1=Digi-key
DD1: "ESP32-S3-WROOM-1U-N16R8", Operation Temperature="-40°C ~ 85°C", Power (V/A)="3.0 ~ 3.6 V", ComponentLink1Description=Datasheet, ComponentLink1URL=https://documentation.espressif.com/esp32-s3-wroom-1_wroom-1u_datasheet_en.pdf, Library Path 1=Module.SchLib, Name Component="MCU Module", Part Number=ESP32-S3-WROOM-1U_1
DD2 DD3 DD4 DD5: "TOUCH SENSOR", Manufacturer=TonTouch, Operation Temperature="-40°C ~ 85°C (TA)", Package/Case=SOT-23-6L, Power (V/A)=2...5,5V, AbridgedComponentDescription=TTP223-BA6, ComponentDescription="Touch sensor  TTP223-BA6  (SOT-23-6L)", ComponentLink1Description=Datasheet, ComponentLink1URL=https://pdf.voron.ua/files/pdf/micoshema/TTP223-BA6_SPEC_V2_1.pdf, Library Path 1=Sensors.SchLib, Manufacturer P/N=TTP223-BA6, Name Component="Touch sensor", Part Number=TTP223-BA6, Supplier 1=3V3, Supplier Part Number 1=TTP223-BA6, Артикул=5005, Наименование 1С="Микросхема TTP223-BA6"
DD6 DD7 DD8 DD9: "ADDRESS LED DISCR SER RGB", Manufacturer=Worldsemi, Operation Temperature="-20 ~ +80", Package/Case=5050, Power (V/A)=1mkA, ComponentLink1Description=Datasheet, ComponentLink1URL=http://www.seeedstudio.com/document/pdf/WS2812B%20Datasheet.pdf, Library Path 1=Opto.SchLib, Manufacturer P/N=WS2812B, Name Component="LED Lighting", Notes=RGB, Part Number=WS2812B, Supplier 1=tme, Supplier Part Number 1=WS2812B
DD10: "Bluetooth 5.1 audio module, QCC3034 chipset", Operation Temperature="-40°C ~ 85°C", Package/Case="13×18 mm", Power (V/A)="2.8 ~ 34.3 V", ComponentLink1Description=Datasheet, ComponentLink1URL=https://tianjiarun-1251103446.cos.ap-guangzhou.myqcloud.com/zb_users/upload/2020/04/SJR-BTM334_SPEC.pdf, Library Path 1=Module.SchLib, Name Component="Bluetooth Module", Part Number=SJR-BTM334
FB1 FB2 FB3: "FERRITE BEAD 1 KOHM 0603 1LN", Manufacturer="Murata Electronics North America", Manufacturer P/N=BLM18KG102SN1D, Package/Case="0603 (1608 Metric)", Power (V/A)=1A, Supplier Part Number 1=490-17349-2-ND, Tolerance=±25%, ComponentLink1Description=Datasheet, ComponentLink1URL=https://media.digikey.com/pdf/Data%20Sheets/Murata%20PDFs/BLM18yyyyyyN1x.pdf, Library Path 1=Inductance.SchLib, Name Component="Ferrite Beads", Part Number=BLM18KG102, Supplier 1=Digi-key
K1: "General Purpose Relay, 1 Form C (1PDT), 12VDC 400Ohm Coil, 120VAC/24VDC @ 10A, 240VAC Max", Operation Temperature="-55°C ~ 125°C (TA)", Power (V/A)=12V, Supplier Part Number 1=Relay10A, ComponentLink1Description=Datasheet, ComponentLink1URL=https://www.tme.eu/Document/311affc211749c2a4c93ad074af62b72/LEG-SERIES.pdf, Library Path 1=Others.SchLib, Name Component=Relay, Part Number=LEG-12
L1 L2 L3: library part NRS4018T3R3, "FIXED IND 10UH 1A 66 MOHM SMD", Manufacturer=TaiyoYuden, Manufacturer P/N=NRS4018T3R3MDGJ, Operation Temperature="-25°C ~ 120°C", Package/Case="4.00mm x 4.00mm", Power (V/A)=2A, Supplier Part Number 1=587-2892-2-ND, Tolerance=±20, ComponentLink1Description=Datasheet, ComponentLink1URL=https://www.yuden.co.jp/productdata/catalog/wound04_e.pdf, Library Path 1=Inductance.SchLib, Name Component="Fixed Inductors", Part Number=NRS4018T3R3, Supplier 1=Digi-key
R1 R2 R6: library part "4.7 k  R0402", "RES SMD 4.7 k OHM  ±1% 1/16W 0402", Operation Temperature="-55℃ to 155℃", Package/Case=0402, Power Rating=0.063W, Temperature Coefficient="±100 ppm/°C", Tolerance=±1%, Library Path 1=Resistor.SchLib, Name Component=Resistror, Part Number="4.7 k  R0402"
R3 R26 R32: library part "100 k  R0402", "RES SMD 100 k OHM  ±1% 1/16W 0402", Operation Temperature="-55℃ to 155℃", Package/Case=0402, Power Rating=0.063W, Temperature Coefficient="±100 ppm/°C", Tolerance=±1%, Library Path 1=Resistor.SchLib, Name Component=Resistror, Part Number="100 k  R0402"
R4 R27 R33: library part "100  R0402", "RES SMD 100 OHM  ±1% 1/16W 0402", Operation Temperature="-55℃ to 155℃", Package/Case=0402, Power Rating=0.063W, Temperature Coefficient="±100 ppm/°C", Tolerance=±1%, Library Path 1=Resistor.SchLib, Name Component=Resistror, Part Number="100  R0402"
R5 R9 R10 R11 R14 R15 R16 R17 R18 R19 R20 R21: library part "330  R0402", "RES SMD 330 OHM  ±1% 1/16W 0402", Operation Temperature="-55℃ to 155℃", Package/Case=0402, Power Rating=0.063W, Temperature Coefficient="±100 ppm/°C", Tolerance=±1%, Library Path 1=Resistor.SchLib, Name Component=Resistror, Part Number="330  R0402"
R7 R8: library part "22  R0402", "RES SMD 22 OHM  ±1% 1/16W 0402", Operation Temperature="-55℃ to 155℃", Package/Case=0402, Power Rating=0.063W, Temperature Coefficient="±100 ppm/°C", Tolerance=±1%, Library Path 1=Resistor.SchLib, Name Component=Resistror, Part Number="22  R0402"
R12 R13 R25: library part "10 k  R0402", "RES SMD 10 k OHM  ±1% 1/16W 0402", Operation Temperature="-55℃ to 155℃", Package/Case=0402, Power Rating=0.063W, Temperature Coefficient="±100 ppm/°C", Tolerance=±1%, Library Path 1=Resistor.SchLib, Name Component=Resistror, Part Number="10 k  R0402"
R22 R23 R24: library part "51  R0402", "RES SMD 51 OHM  ±1% 1/16W 0402", Operation Temperature="-55℃ to 155℃", Package/Case=0402, Power Rating=0.063W, Temperature Coefficient="±100 ppm/°C", Tolerance=±1%, Library Path 1=Resistor.SchLib, Name Component=Resistror, Part Number="51  R0402"
R28 R29 R31 R37: library part "100 k  R0603", "RES SMD 100 k OHM  ±1% 1/10W 0603", Operation Temperature="-55℃ to 155℃", Package/Case=0603, Power Rating=0.1W, Temperature Coefficient="±100 ppm/°C", Tolerance=±1%, Library Path 1=Resistor.SchLib, Name Component=Resistror, Part Number="100 k  R0603"
R30 R38: library part "100  R0603", "RES SMD 100 OHM  ±1% 1/10W 0603", Operation Temperature="-55℃ to 155℃", Package/Case=0603, Power Rating=0.1W, Temperature Coefficient="±100 ppm/°C", Tolerance=±1%, Library Path 1=Resistor.SchLib, Name Component=Resistror, Part Number="100  R0603"
R34 R35 R36: library part "10 k  R0603", "RES SMD 10 k OHM  ±1% 1/10W 0603", Operation Temperature="-55℃ to 155℃", Package/Case=0603, Power Rating=0.1W, Temperature Coefficient="±100 ppm/°C", Tolerance=±1%, Library Path 1=Resistor.SchLib, Name Component=Resistror, Part Number="10 k  R0603"
SB1 SB2: Operation Temperature="-20°C ~ 70°C", Library Path 1=Switches.SchLib, Name Component=Switch, Part Number=FB-10B
SN1 SN2 SN3 SN4: "1.1mm Pad for Plug-In or Receptacle", Manufacturer=NONE, Ajax_1C_PN=NONE, Ajax_1С_Status="RND Only", Component Status=Released, Component Type=PTH, ComponentLink1Description=Datasheet, ComponentLink1URL=NONE, Part Number=PAD-1.1mm, Part Type=Pad, Price=NONE, Replacement=NONE, Temperature range=NONE
U1 U3: "15W 85-264V AC-DC PCB-Mount Green Power Module, 15V @ 1.4A", Operation Temperature="-40°C ~ 85°C", Power (V/A)="15 V 1.4A", ComponentLink1Description=Datasheet, ComponentLink1URL=https://kosmodrom.ua/storage/pdf/IRM-20.pdf, Library Path 1=Module.SchLib, Name Component=AC-DC, Part Number=IRM-20-15
U2: "3W DC/DC Power Supply, Vout 12V, Size 22.0x9.5x12.0mm", Manufacturer=rlt, Part Number="{Part Number}"
U4: library part LD1117S33CTR, "IC REG LINEAR 3.3V 800MA SOT223", Manufacturer=STMicroelectronics, Operation Temperature="-40°C ~ 125°C", Package=SOT-223, Power (V/A)="0.8 A 3.3 В", Supplier Part Number 1=497-1241-2-ND, Temperature range="0°C ~ 125°C", Component Type=SMD, ComponentDescription="Linear Regulators  LD1117S33CTR  (SOT-223)", ComponentLink1Description=Datasheet, ComponentLink1URL=https://www.st.com/content/ccc/resource/technical/document/datasheet/99/3b/7d/91/91/51/4b/be/CD00000544.pdf/files/CD00000544.pdf/jcr:content/translations/en.CD00000544.pdf, Library Path 1="Power converters.SchLib", Manufacturer P/N=LD1117S33CTR, Name Component="Linear Regulators", Package/Case=SOT-223, Part Number=LD1117S33CTR, Part Type="Power / Linear Regulator", Price=0,11994941, Supplier 1=Digi-key
U5: "85-264VAC  5W 3.3V 1.5A", Operation Temperature="-40°C ~ 85°C", Power (V/A)="3.3 V 1.5A", ComponentLink1Description=Datasheet, Library Path 1=Module.SchLib, Name Component=AC-DC, Part Number="HI-LINK 5M03"
U6 U7: "HIGH EFFICIENCY 1.2MHZ 2A STEP UP CONVERTER", Manufacturer=AEROSEMI, Manufacturer P/N="MT3608 AEROSEMI", Operation Temperature="-40°C ~ 125°C", Package/Case=SOT23-6, Power (V/A)="2 A", Supplier Part Number 1=-, ComponentDescription="Power converters  MT3608  (SOT23-6)", ComponentLink1Description=Datasheet, ComponentLink1URL=http://mini-tech.com.ua/download/datasheet/power_supply/MT3608.pdf, Library Path 1="Power converters.SchLib", Name Component="Power converters", Part Number=MT3608, Supplier 1=-
VD1: "TVS DIODE 5.25V 17V SOT23-6", Manufacturer=STMicroelectronics, Operation Temperature="-40°C ~ 125°C (TJ)", Package/Case=SOT-23-6, Power Rating="17V 5A", Supplier Part Number 1=497-5235-2-ND, ComponentLink1Description=Datasheet, ComponentLink1URL=https://www.st.com/resource/en/datasheet/usblc6-2.pdf, Library Path 1=Diodes.SchLib, Manufacturer P/N=USBLC6-2SC6, Name Component="TVS - Diodes", Part Number=USBLC6-2SC6, Supplier 1=Digi-key
VD2 VD4 VD9: "DIODE GEN PURP 75V 250MA SOD323", Manufacturer="Diodes Incorporated", Operation Temperature="-55°C ~ 150°C", Package/Case=SOD-80, Power Rating="75V 250mA", ComponentLink1Description=Datasheet, Library Path 1=Diodes.SchLib, Manufacturer P/N=1N4148, Name Component=Diode, Part Number=1N4148, Supplier 1=Digi-key, Supplier Part Number 1=1N4148
VD3 VD5 VD6: "SSR RELAY SPST-NO 500MA 0-60V", Manufacturer="Panasonic Electric Works", Operation Temperature="-40 ~ +85", Package/Case=4-SOP, Power (V/A)="0 V ~ 60 V", ComponentLink1Description=Datasheet, ComponentLink1URL=https://media.digikey.com/pdf/Data%20Sheets/Panasonic%20Electric%20Works%20PDFs/AQW,AQY280,282,284.pdf, Library Path 1=Opto.SchLib, Name Component=Optotransistor, Part Number=AQY282SX, Supplier 1=Digi-key
VD7 VD8: "DIODE SCHOTTKY 40V 1A SOD-123", Manufacturer="Diodes Incorporated", Package/Case=SOD-123, Power Rating="1A 40V", ComponentLink1Description=Datasheet, ComponentLink1URL=https://www.mouser.com/datasheet/2/115/DIOD_S_A0011683586_1-2543674.pdf?srsltid=AfmBOooSNGKg6kFHsm5EDerUk8pACA_mvoqB5hN7nSVKhWQ3aDU_xIdt, Library Path 1=Diodes.SchLib, Name Component="Diode Schottky", Part Number=1N5819HW-7-F, Supplier 1=Kosmodrom
VT1 VT3 VT5 VT6: "P-Channel 12 V 15A (Ta) 2W (Ta) Surface Mount U-DFN2020-6 (Type F)", Manufacturer="Diodes Incorporated", Operation Temperature="-55°C ~ 150°C (TJ)", Package/Case="U-DFN2020-6 (Type F)", Power Rating=12V15A, Supplier Part Number 1=DMP1009UFDF-13-ND, ComponentLink1Description=Datasheet, ComponentLink1URL=https://www.diodes.com/assets/Datasheets/DMP1009UFDF.pdf, Library Path 1=Transistors.SchLib, Manufacturer P/N=DMP1009UFDF-13, Name Component=Transistor, Part Number=DMP1009UFDF-13, Supplier 1=Digi-key
VT2 VT4 VT7 VT8: "TRANS PREBIAS NPN 50V 100MA SC75", Manufacturer=onsemi, Operation Temperature="-55°C ~ 150°C (TJ)", Package/Case=SOT-416, Power Rating="100mA 50V", Supplier Part Number 1=DTC143ZET1GOSTR-ND, ComponentLink1Description=Datasheet, ComponentLink1URL=https://www.onsemi.com/pdf/datasheet/dtc143z-d.pdf, Library Path 1=Transistors.SchLib, Manufacturer P/N=DTC143ZET1G, Name Component=Transistor, Part Number=DTC143ZET1G, Supplier 1=Digi-key
VT9: "P-Channel 30 V 11A (Ta), 29A (Tc) 3.1W (Ta), 25W (Tc) Surface Mount 8-DFN-EP (3x3)", Manufacturer="Alpha & Omega Semiconductor Inc.", Operation Temperature="-55°C ~ 150°C (TJ)", Package/Case=DFN3x3, Power Rating="30V 15A", Supplier Part Number 1=785-1581-2-ND, ComponentLink1Description=Datasheet, ComponentLink1URL=https://imrad.com.ua/userdata/modules/productFiles/XwMaVOEl_AON7403_ao.pdf, Library Path 1=Transistors.SchLib, Manufacturer P/N=AON7403, Name Component=Transistor, Part Number=AON7403, Supplier 1=Digi-key
X1 X4 X7: "FPC CONNECTOR", ComponentLink1Description=Datasheet, Library Path 1=Connectors.SchLib, Name Component=FPC_14PIN, Part Number=FPC_14PIN
X2: "Mini HDMI Connector With Female SMT 19P 0.5A 40V AC", Manufacturer=KLS, Package/Case=Mini-HDMI, Power (V/A)="40V 0.5A", ComponentLink1Description=Datasheet, ComponentLink1URL=https://www.kycon.com/2013Catalogpage/HDMI/KMDMIX.pdf, Library Path 1=Connectors.SchLib, Manufacturer P/N=HDMI-302-1-N-30, Name Component=MINI_HDMI, Part Number=HDMI-302-1-N-30
X3 X5 X6 X12: "CONN HEADER 3POS 1MM", Manufacturer="Joint Tech", Operation Temperature=-25...85°C, Package/Case=1mm, Power (V/A)="1А 50В", Temperature range="-40°C ~ 105°C", Ajax_1C_PN=NONE, Ajax_1С_Status="RND Only", Component Status=Review_1, Component Type=SMD, ComponentLink1Description=Datasheet, ComponentLink1URL=https://www.tme.eu/Document/82e53032519d6eb0cf96ad88610f3e77/A1001WR-S-XP---12B5.pdf, Library Path 1=Connectors.SchLib, Manufacturer P/N=A1001WR-S-3P, Name Component="Rectangular Connectors - Headers", Part Number=A1001WR-S-3P, Part Type="Wire-to-Board / 1mm", Price=NONE, Replacement=SM03B-SRSS-TB, Supplier 1=Kosmodrom
X8 X9: library part HDMI-302-1-N-31, "Screw Terminal, 7.5mm Pitch, 2 pin, Black", Manufacturer=Degson, Operation Temperature=-20...120°C, Power (V/A)="300 10A", ComponentLink1Description=Datasheet, ComponentLink1URL=https://www.tme.eu/Document/ec81fb91e085f8fed6c76d9ebffab4bb/dg300-7.5.pdf, Library Path 1=Connectors.SchLib, Name Component="Power Connectors", Part Number=HDMI-302-1-N-31
X10 X11: "Jumper 1.5mm x 2mm", Package/Case="1.5mm x 2mm", AbridgedComponentDescription="Jumper 1.5х2", ComponentDescription="Jumper  Jumper 1.5х2  (1.5mm x 2mm)", ComponentLink1Description=Datasheet, Library Path 1=Others.SchLib, Name Component=Jumper, Part Number="Jumper 1.5х2"
XP1: Manufacturer="KLS ELECTRONIC CO., LTD.", Operation Temperature="-55 °C to +105 °C", Power (V/A)="3А 250В", ComponentLink1Description=Datasheet, ComponentLink1URL=http://www.kosmodrom.com.ua/pdf/USB-Type-C-B-229.pdf, Library Path 1=Connectors.SchLib, Name Component=USB-Type-C, Package/Case=USB-Type-C-B-229, Part Number=USB-Type-C-B-229, Supplier 1=Kosmodrom
XP2: "CONN UMC RCPT STR 50 OHM SMD", Manufacturer=HIROSE, Operation Temperature="-10°C …. 40°C", Package/Case="Male Pin", ComponentLink1Description=Datasheet, ComponentLink1URL=https://www.tme.eu/ua/ru/details/u.fl-r-smt-1-01/mikrorazemy/hirose/u-fl-r-smt-1-01/, Library Path 1=Connectors.SchLib, Manufacturer P/N=U.FL-R-SMT-1(01), Name Component="U.FL (IPX/AMC)", Part Number=U.FL-R-SMT-1(01), Supplier 1=TME
XP3: "PIN: 3; A2501; 3A; 250V; UL94V-0", Manufacturer="JOINT TECH", Operation Temperature="-40°C ~ 80°C", ComponentLink1Description=Datasheet, ComponentLink1URL=https://documents.tme.eu/v7/_solaris-tep_/pVersion=0046&contRep=ZT&docId=005056AB752F1EE383C6617DFE942CAD&compId=A2501WV-XP.pdf?ci_sign=9baf55e1d4ede3a69cd97522aa56fece6c405150, Library Path 1=Connectors.SchLib, Name Component="Power Connectors", Part Number=A2501WR-03P, Supplier 1=RCS
XS1: "DC POWER JACK CONNECTOR 6.3MM", Manufacturer=KLS, Operation Temperature="-25°C ~ 85°C", Power (V/A)=2A/250V, ComponentLink1Description=Datasheet, ComponentLink1URL=https://static.chipdip.ru/lib/078/DOC001078433.pdf, Library Path 1=Connectors.SchLib, Manufacturer P/N=DJK-02A, Name Component="Power socket", Package/Case=DJK-02A, Part Number=DJK-02A, Supplier 1=-, System=Connector

## Free pads (board coordinates)
  round 7 / inner round 5 / far side round 5 hole 3.2: MH(5,80)
  round 7 hole 3.2: MH(18.5,8.5) MH(20,93.5) MH(95,23)

## Via types
v1: diameter 0.6, hole 0.3, Top Layer to Bottom Layer, tented both sides, 1554 vias
v2: diameter 0.7/0.8 (per signal layer), hole 0.3, Top Layer to Bottom Layer, tented both sides, 1 vias

## Nets (pads, with @x,y where several pads share a name; then routed paths per layer and width w, separated by ;. In a path a pad name is that pad's centre, name@x,y a point inside that pad or via, vN(x,y) a via of type N, cw(c..) or ccw(c..) an arc to the next point about the centre after c; other vN are vias at no path point)
3V3: C29.1 C30.1 C31.1 FB1.2 R3.2 R12.1 R13.1 U4.2 U4.4 VT1.S X4.3 X4.4 X10.1 | length 127.2
  Top Layer w0.2: R12.1@31.775,23.2 31.775,24.5 33.9,26.625 v1(41.4,26.625) ; R13.1@51.657,5.975 51.682,5.975 52.192,6.485 FB1.2@53.081,6.485
  Top Layer w0.3: X4.4@6.425,8.928 5.172,8.928 4.997,9.104 4.997,9.428 ; X4.3@6.425,9.428 4.997,9.428 ; v1(29.175,11.175) 27.45,11.175 27.085,10.81 25.565,10.81 23.047,13.328 14.106,13.328 11.799,11.022 5.172,11.022 4.997,10.846 4.997,9.428
  Top Layer w0.5: C30.1@57.9,13.518 57.975,13.518 60.101,15.645 62.007,15.645 62.3,15.937 R3.2@62.3,18.65 ; R3.2@62.313,18.65 VT1.S@62.313,20.462
  Top Layer w0.7: FB1.2@53.395,6.484 53.416,6.505 v1@53.416,7.674 ; v1@53.501,7.9 53.501,10.89 55.86,13.249 57.424,13.249 C30.1@57.725,13.55
  Bottom Layer w0.3: v1(29.175,11.175) 33.479,11.175 40.275,17.971 40.275,21.964 41.409,23.098 41.409,26.616 v1(41.4,26.625) ; v1@41.4,26.641 44.525,26.641 v1(44.525,27.95) v1(44.525,28.797)
  Bottom Layer w1: 46.382,33.282 44.53,33.282 44.53,9.434 46.477,7.488 v1@52.925,7.488
  other v1: 52.925,7.275 53.55,7.275 53.55,7.9 44.525,29.65
3V3_ISO: R1.2 R2.2 R6.2 R26.1 VT1.D VT3.S X1.2 X1.6 X2.18 X3.2 | length 175.9
  Top Layer w0.3: 1.927,20.802 X1.6@6.425,20.802 ; 2.277,22.802 X1.2@6.425,22.802 ; v1(24.825,8.8) 24.847,8.822 25.575,8.822 v1(26.293,9.54) ; v1(26.275,11.4) 26.9,12.025 v1(27.941,12.025) ; v1@27.942,12.026 R2.2@28.733,12.026 ; v1@27.942,13.326 R1.2@28.733,13.326 ; VT1.D@63,19.525 63.012,19.536 63.012,20.149 VT1.D@63.325,20.462 63.012,20.775 63.012,21.388 VT1.D@63,21.4 ; VT1.D@63.638,20.149 63.638,19.536 VT1.D@63.65,19.525 ; VT1.D@63.638,20.775 63.638,21.388 VT1.D@63.65,21.4 63.65,21.412 63.86,21.622 63.86,21.644 64.745,22.529 83.501,22.529 84.65,21.38 84.65,12.475 88.5,8.625 88.974,8.625 89.15,8.449 X2.18@89.15,7.65
  Top Layer w0.4: v1(1.92,2.017) 1.925,2.022 1.925,20.8 ; 1.927,20.802 1.925,20.8 ; 2.277,22.802 1.925,22.45 1.925,20.8
  Top Layer w0.6: v1(21.45,0.8) 21.45,2.425 22.343,3.318 24.775,3.318 ; v1(24.825,6.597) 24.825,5.359 X3.2@24.822,5.357 24.822,3.365 24.775,3.318 ; VT3.S@65.203,20.294 65.203,18.597 R26.1@65.3,18.5 ; R26.1@65.281,18.519 66.275,18.519 66.275,1.151 65.924,0.8 28.976,0.8 28.6,1.176 R6.2@28.6,3.325 28.438,3.325 28.431,3.318 24.775,3.318
  Top Layer w0.8: VT1.D@63.325,20.462 64.988,20.462
  Bottom Layer w0.3: v1(24.825,6.597) v1(24.825,8.8) ; v1(26.275,11.4) 26.284,11.391 26.284,9.549 v1(26.293,9.54) ; v1(27.941,12.025) v1(27.941,13.325)
  Bottom Layer w0.6: v1(1.92,2.017) 3.138,0.8 v1(21.45,0.8)
3V3_SENS: C7.1 C8.1 C11.1 C12.1 C14.2 DD2.5 DD3.5 DD4.5 DD5.5 X7.11 X7.12 | length 110.6
  Top Layer w0.4: DD3.5@12.521,93.184 12.527,93.178 12.527,91.74 C12.1@12.533,91.734 14.341,91.734 14.575,91.968 14.575,97.45 15.95,98.825 31.2,98.825 40.149,89.876 45.871,89.876 ; DD2.5@45.871,93.134 45.871,91.684 45.871,89.876 ; DD5.5@52.2,94.975 50.75,94.975 49.409,94.975 49.175,94.741 49.175,89.876 ; 73.925,93.65 73.925,97.925 ; v1(77.1,97.925) 73.925,97.925 ; v1(79.2,97.925) 84.1,97.925 C8.1@84.1,94.965 85.55,94.965 DD4.5@85.55,95 ; 45.871,89.876 49.175,89.876 ; 49.175,89.876 62.171,89.876 62.405,90.11 C14.2@62.405,92.725 62.405,97.691 62.639,97.925 73.925,97.925
  Bottom Layer w0.4: v1(77.1,97.925) v1(79.2,97.925)
3V3BLE: DD10.7 FB2.1 FB3.1 VT3.D | length 35.7
  Top Layer w0.3: VT3.D@65.962,19.536 VT3.D@65.962,20.149 ; VT3.D@65.962,20.775 VT3.D@65.962,21.388 ; VT3.D@66.588,19.536 VT3.D@66.588,20.149 ; VT3.D@66.588,20.775 VT3.D@66.588,21.388
  Top Layer w0.6: VT3.D@66.275,20.462 66.32,20.507 68.68,20.507 69.423,21.25 70.05,21.25 70.125,21.325 FB3.1@70.125,21.4 ; 68.967,20.734 68.978,20.734 68.978,19.803 71.18,17.601 78.723,17.601 79.299,17.025 79.299,9.401 79.825,8.874 83.049,8.874 83.4,9.226 83.4,12.95 83.725,13.275 83.725,13.35 83.8,13.425 FB2.1@83.875,13.425
5V0_ISO: C34.1 C35.1 C36.1 C38.1 R29.2 VD8.1 X4.1 X4.2 X12.1 | length 25.4
  Top Layer w0.3: R29.2@16.447,17.244 C34.1@16.447,19.54
  Top Layer w0.5: VD8.1@16.436,21.544 cw(c16.407,21.515) VD8.1@16.447,21.515
  Top Layer w0.6: X12.1@11.147,5.357 11.147,6.847 v1(11.15,6.85) ; v1(11.146,8.107) 11.15,8.11 11.15,10.19
  Top Layer w0.8: 6.19,10.19 11.15,10.19 12.665,10.19 v1(14.303,11.828)
  Top Layer w1: C36.1@14.621,22.126 14.621,19.623 C34.1@16.446,19.592 16.446,21.514 VD8.1@16.447,21.515
  Bottom Layer w0.6: v1(11.146,8.107) 11.15,8.103 v1(11.15,6.85)
  Bottom Layer w1: v1@14.65,12.525 14.65,15.686
  other v1: 14.925,11.828 14.303,12.45 14.925,12.45 14.328,15.753 14.95,15.753 14.328,16.375
5V0_SENS: C13.2 C15.1 C16.1 C17.1 C18.1 DD6.1 DD7.1 DD8.1 DD9.1 X7.13 X7.14 | length 115.8
  Top Layer w0.5: v1(4.75,90.5) C16.1@3.875,90.5 3.875,87.594 4.168,87.301 67.15,87.301 72.895,87.301 97.182,87.301 97.475,87.594 C15.1@97.475,90.5 v1(98.425,90.5) ; 33.95,87.575 C18.1@33.95,90.5 ; C18.1@33.975,90.5 v1(34.95,90.5) ; 67.15,87.5 67.15,90.5 v1(68.275,90.5) ; 72.895,87.5 72.895,90.5 72.895,93.675 72.895,93.775
12V0: C24.1 C25.1 C43.1 C47.1 C51.1 L3.2 VT9.5 VT9.6 VT9.7 VT9.8 XP3.1 | length 38.4
  Top Layer w1: VT9.8@59.164,34.59 59.26,34.59 59.75,34.1 VT9.8@59.75,33.49
  Top Layer w1.2: VT9.8@59.32,33.49 60.61,32.2 C25.1@62.475,32.2 66.304,32.2 67.423,33.319 C51.1@70.027,33.319 ; C51.1@70.027,33.349 89.474,33.349 90.625,34.5 XP3.1@90.825,34.5
  Bottom Layer w1: L3.2@59.274,33.529 ccw(c59.274,34.805) 60.55,34.805 C24.1@60.55,35.788 ; 59.587,35.713 60.475,35.713 C24.1@60.55,35.788 ; C24.1@60.55,35.85 C24.1@60.55,35.788
  other v1: 58.7,35.3 59.35,35.3 58.7,35.95 59.35,35.95
-12V0: C42.2 C49.2 U2.7 XP3.3 | length 16.3
  Bottom Layer w1.2: U2.7@83.292,30.925 83.294,30.925 86.532,34.163 C42.2@86.532,40.93 ; C42.2@86.534,40.978 86.534,41.046 89.029,41.046 90.575,39.5 XP3.3@90.825,39.5
AC_L: K1.3 U5.2 X8.2
AC_L_SYS: K1.4 U1.2 U3.2 X9.1
AC_N: U1.1 U3.1 U5.1 X8.1 X9.2